# Altium PCB jetson_agx_breakout.PcbDoc
Units mil, origin at the board's own origin, x right, y up, seen from the top; angles counter-clockwise.
Board outline 2200 x 1550 mil, 2 copper layers (Top Layer, Bottom Layer); 27 components, 30 nets, 133 pads, 18 vias.
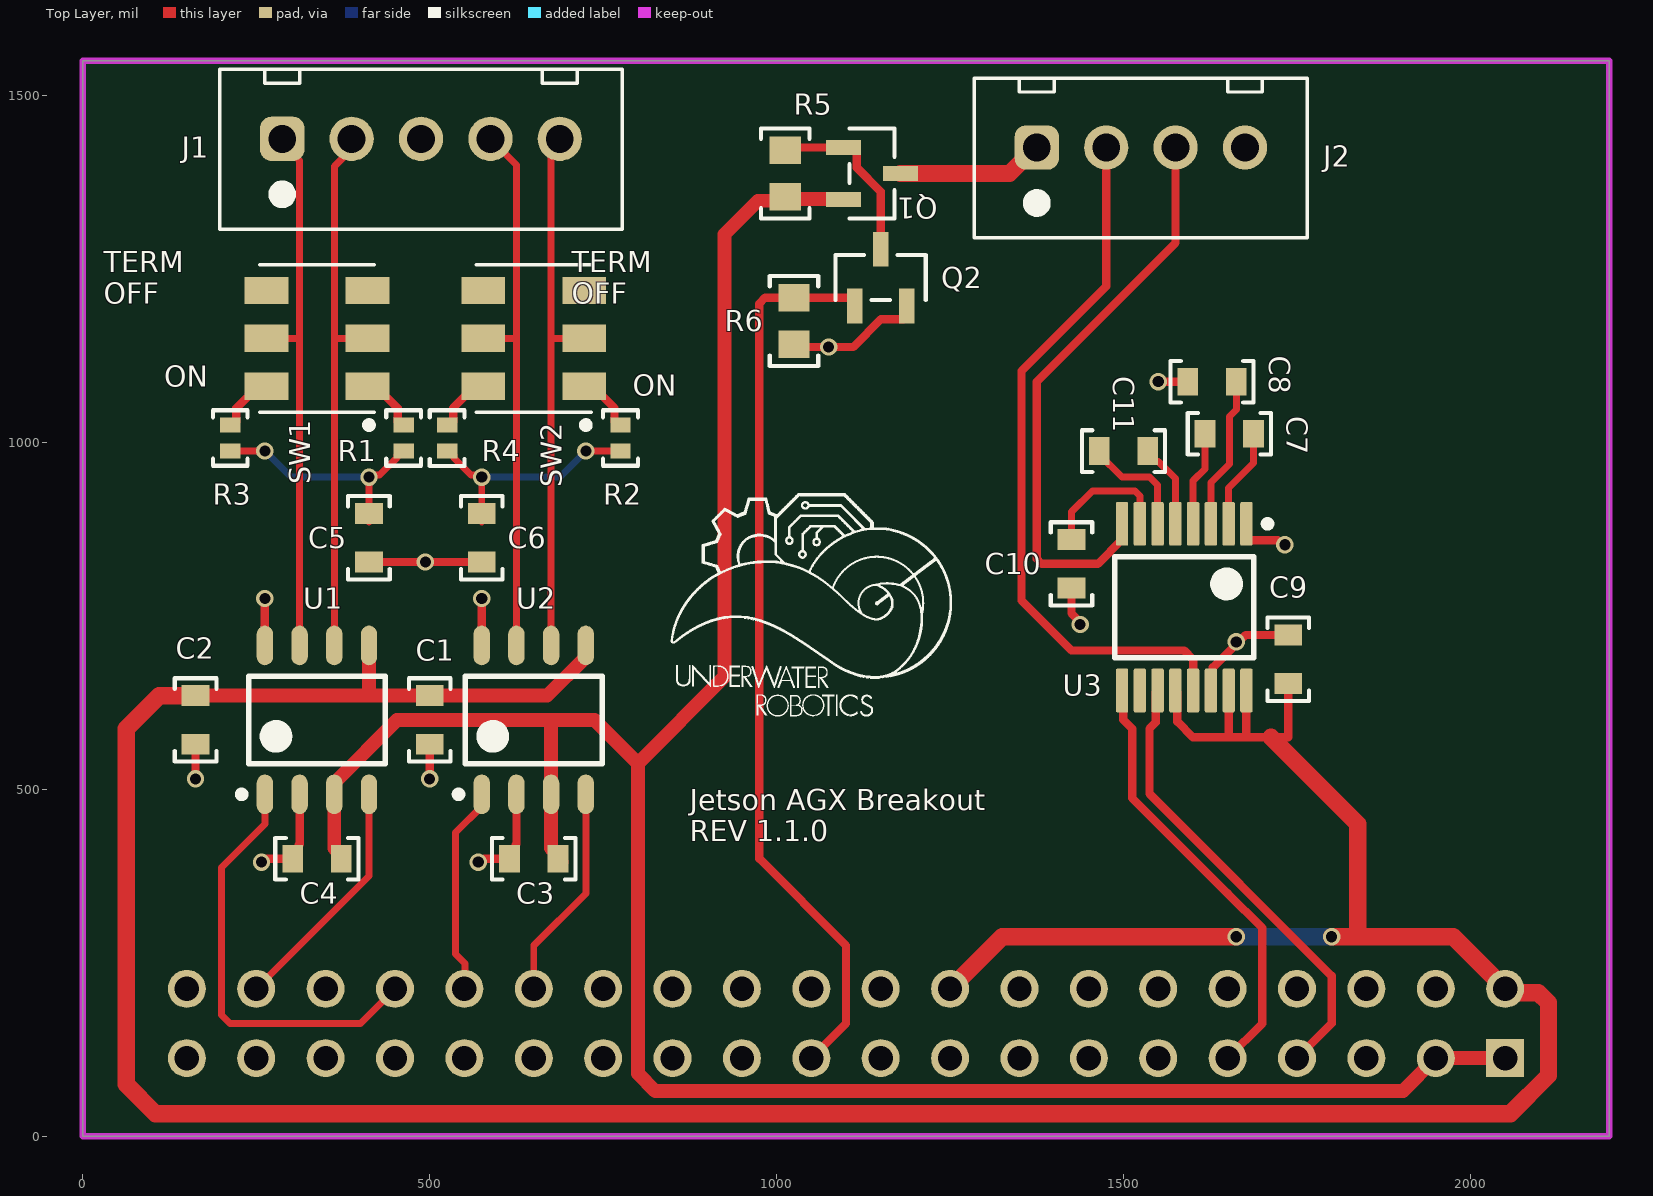
[diagram p0: Top Layer view]
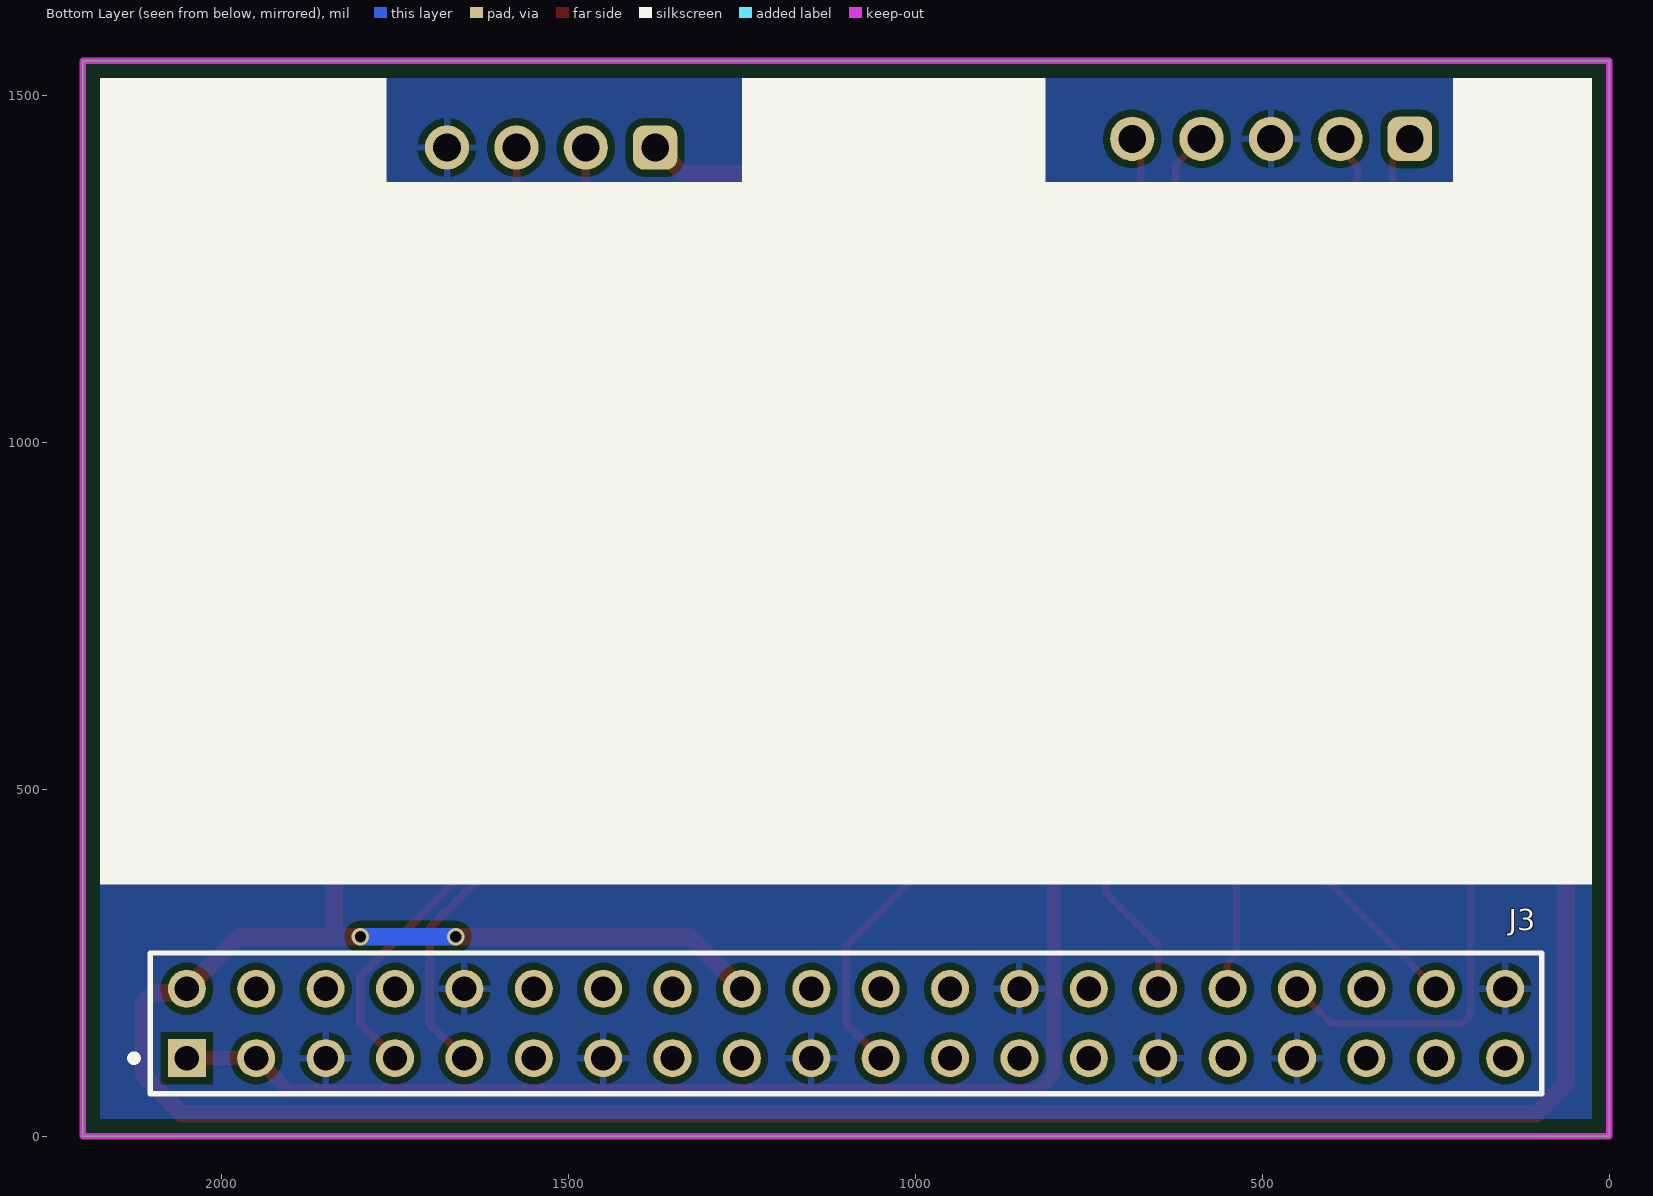
[diagram p1: Bottom Layer view, seen from below]
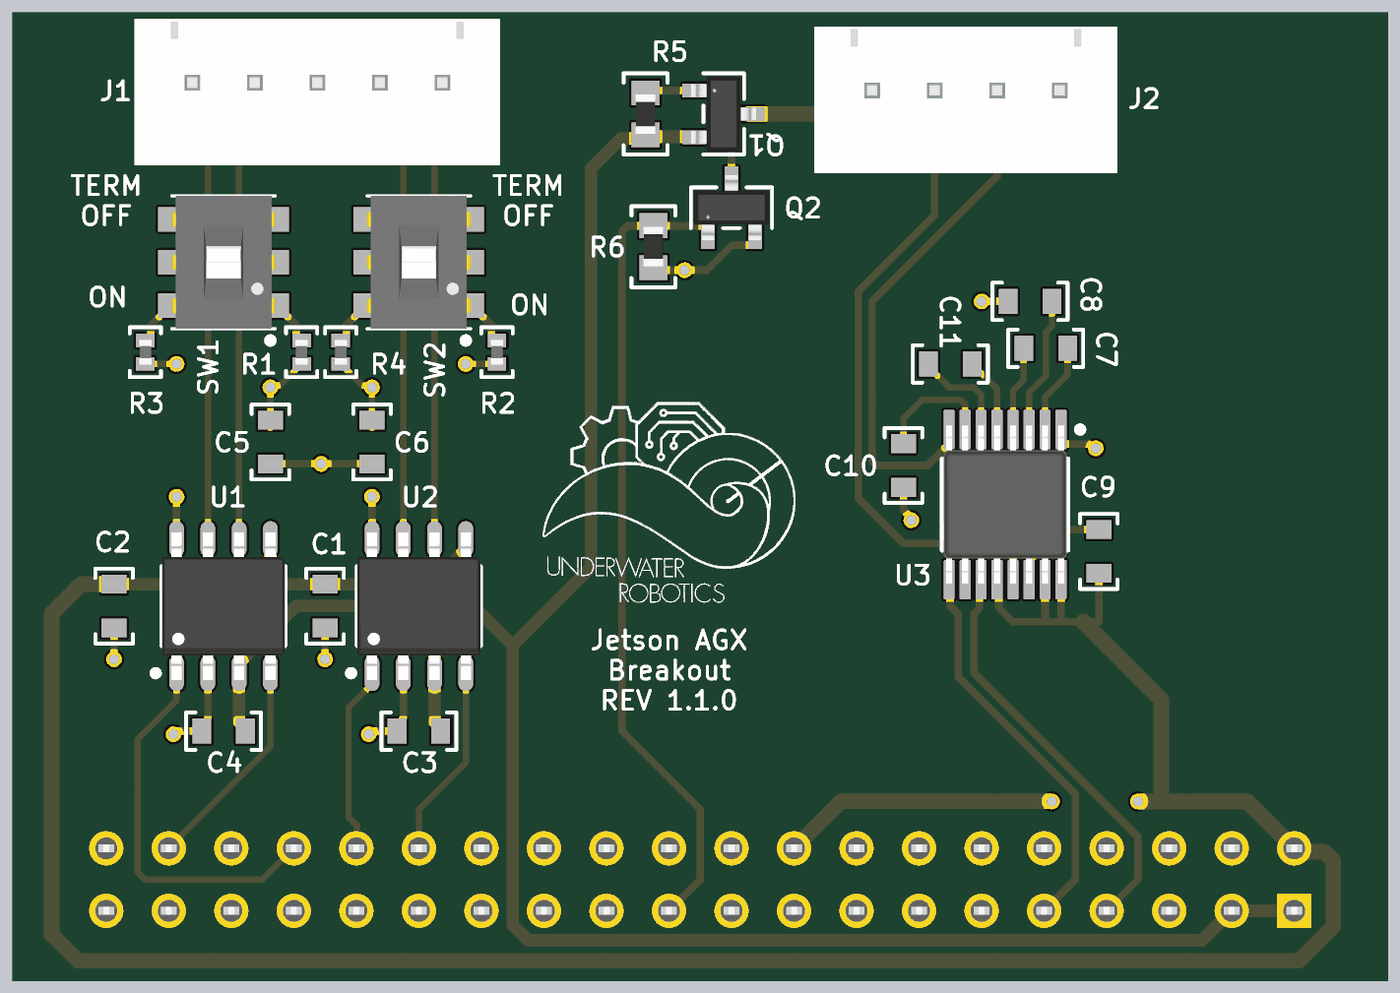
[diagram p2: 3D render of the assembled board from above, using the file's embedded part models]

## Layer stack, top to bottom
Top Solder: solder mask 0.4, Solder Resist, Dk 3.5
Top Layer: signal copper 1.4
Dielectric 1: dielectric 12.6, FR-4, Dk 4.8
Bottom Layer: signal copper 1.4
Bottom Solder: solder mask 0.4, Solder Resist, Dk 3.5

## Board outline
0,0 0,1550 2200,1550 2200,0

## Design rules (kind name [scope] priority, off if disabled: settings)
Clearance [All] p1: gap=10 ignorepadtopadclearanceinfootprint=FALSE except(0: Arc-Hole Track-Hole SMDPad-Hole THPad-Hole Via-Hole Fill-Hole Poly-Hole Region-Hole Text-Hole; 6: Arc-SMDPad Track-SMDPad SMDPad-SMDPad SMDPad-THPad SMDPad-Via SMDPad-Fill SMDPad-Poly SMDPad-Region)
MinimumSolderMaskSliver [All] p1: minsoldermaskwidth=7
PolygonConnect [All] p1: connectstyle=Relief reliefconductorwidth=10 reliefentries=4 polygonreliefangle="90 Angle" airgapwidth=10
RoutingVias [All] p1: holewidth=16 width=25 viastyle="Through Hole" minholewidth=16 minwidth=20 maxholewidth=28 maxwidth=50
SilkToSolderMaskClearance [IsPad] p1: minsilkscreentomaskgap=5 clearancetoexposedcopper=TRUE
SolderMaskExpansion [All] p1: expansion=4 istentingtop=FALSE
Width [All] p1: maxlimit=50 minlimit=10 preferedwidth=10
28 further rules are at their usual default settings.

## Components (designator, comment, footprint, x,y, rotation, side; value= is the part's Value field where it differs from the comment)
C1 "1uF Ceramic 16V" CAPACITOR_0603 500,600 r270 top value=1uF
C2 "1uF Ceramic 16V" CAPACITOR_0603 162.5,600 r270 top value=1uF
C3 "10uF Ceramic 6.3V" CAPACITOR_0603 650,400 r180 top
C4 "10uF Ceramic 6.3V" CAPACITOR_0603 337.5,400 r180 top
C5 "10nF Ceramic 6.3V" CAPACITOR_0603 412.5,862.5 r90 top value=0.01uF
C6 "10nF Ceramic 6.3V" CAPACITOR_0603 575,862.5 r90 top value=0.01uF
C7 "100nF Ceramic 6.3V" CAPACITOR_0603 1652.5,1012.5 r180 top value=0.1uF
C8 "100nF Ceramic 6.3V" CAPACITOR_0603 1627.5,1087.5 r180 top value=0.1uF
C9 "100nF Ceramic 6.3V" CAPACITOR_0603 1737.5,687.5 r90 top value=0.1uF
C10 "100nF Ceramic 6.3V" CAPACITOR_0603 1425,825 r270 top value=0.1uF
C11 "100nF Ceramic 6.3V" CAPACITOR_0603 1500,987.5 r180 top value=0.1uF
J1 "XH2.54 VERT" CONN_JST_XH254_5POS_VERT 287.5,1437.5 r0 top
J2 "XH2.54 VERT" CONN_JST_XH254_4POS_VERT 1375,1425 r0 top
J3 "7-534206-0" FP-7-534206-0-MFG 1100,162.5 r180 bottom
Q1 "MOSFET P-CHANNEL 20V 4.7A SOT23" SOT-23-3 1137.5,1387.5 r270 top
Q2 "MOSFET N-CH 30V 5.8A SOT-23-3" SOT-23-3 1150,1237.5 r0 top
R1 "60.4 Ohm 1% 1/16W" RESISTOR_0402 462.5,1006.3 r270 top
R2 "60.4 Ohm 1% 1/16W" RESISTOR_0402 775,1006.3 r270 top
R3 "60.4 Ohm 1% 1/16W" RESISTOR_0402 212.5,1006.3 r270 top
R4 "60.4 Ohm 1% 1/16W" RESISTOR_0402 525,1006.2 r270 top
R5 "10k Ohm 5% 1/10W" RESISTOR_0603 1012.5,1387.5 r90 top
R6 "10k Ohm 5% 1/10W" RESISTOR_0603 1025,1175 r270 top
SW1 "Switch DPDT" CAS-220TA 337.5,1150 r90 top
SW2 "Switch DPDT" CAS-220TA 650,1150 r90 top
U1 "CAN Transceiver" SOIC-8 337.5,600 r90 top
U2 "CAN Transceiver" SOIC-8 650,600 r90 top
U3 "SN65C3221EPWR" PW0016A_M 1587.5,762.5 r270 top

## Footprints (in the part's own frame and the unit in brackets; to place one, negate y for a bottom-side part, rotate by r counter-clockwise, add the part's x,y. Pads: shape width x height; smd on the part's side, far side on the other; paste and mask are expansions set on the pad)
CAPACITOR_0603 [mil] "CAPACITOR 0603"
  rect 30x40 smd: 1(-35,0) 2(35,0)
  silkscreen extent -60,-30 60,30, body extent -31,-16 32,16, height 31
CAS-220TA [mm] "SWITCH SLIDE DPDT 100MA 6V"
  rrect0% 1x1.6 smd: 1(-1.75,-1.85) 2(0,-1.85) 3(1.75,-1.85) 4(-1.75,1.85) 5(0,1.85) 6(1.75,1.85)
  silkscreen extent -3.3,-2.1 2.7,2.1, body extent -2.7,-2.1 2.7,2.1, height 2.51
CONN_JST_XH254_4POS_VERT [mm] "JST XH 2.54mm Pitch 4 Pos Vertical"
  rrect50% 1.62x1.62 hole 1.02: 1(0,0)
  round 1.62 hole 1.02: 2(2.54,0) 3(5.08,0) 4(7.62,0)
  silkscreen extent -2.29,-3.3 9.91,2.54, body extent -2.34,-3.35 9.96,2.49, height 7.21
CONN_JST_XH254_5POS_VERT [mm] "JST XH 2.54mm Pitch 5 Pos Vertical"
  rrect50% 1.62x1.62 hole 1.02: 1(0,0)
  round 1.62 hole 1.02: 2(2.54,0) 3(5.08,0) 4(7.62,0) 5(10.16,0)
  silkscreen extent -2.29,-3.3 12.45,2.54, body extent -2.34,-3.35 12.5,2.49, height 7.21
FP-7-534206-0-MFG [mm]
  rect 1.39x1.39 hole 0.89 paste-1000 mask+0: 1(-24.13,-1.27)
  round 1.39 hole 0.89 paste-1000 mask+0: 2(-24.13,1.27) 3(-21.59,-1.27) 4(-21.59,1.27) 5(-19.05,-1.27) 6(-19.05,1.27) 7(-16.51,-1.27) 8(-16.51,1.27) 9(-13.97,-1.27) 10(-13.97,1.27) 11(-11.43,-1.27) 12(-11.43,1.27) 13(-8.89,-1.27) 14(-8.89,1.27) 15(-6.35,-1.27) 16(-6.35,1.27) 17(-3.81,-1.27) 18(-3.81,1.27) 19(-1.27,-1.27) 20(-1.27,1.27) 21(1.27,-1.27) 22(1.27,1.27) 23(3.81,-1.27) 24(3.81,1.27) 25(6.35,-1.27) 26(6.35,1.27) 27(8.89,-1.27) 28(8.89,1.27) 29(11.43,-1.27) 30(11.43,1.27) 31(13.97,-1.27) 32(13.97,1.27) 33(16.51,-1.27) 34(16.51,1.27) 35(19.05,-1.27) 36(19.05,1.27) 37(21.59,-1.27) 38(21.59,1.27) 39(24.13,-1.27) 40(24.13,1.27)
  silkscreen extent -26.19,-2.58 25.47,2.58, body extent -25.4,-2.51 25.4,2.51, height 8.64
PW0016A_M [mm] "SOP, 16-Leads, Body 5.1x4.5mm, Pitch 0.65mm, IPC Low Density"
  rrect22% 1.6x0.45 smd: 1(-3.05,2.275) 2(-3.05,1.625) 3(-3.05,0.975) 4(-3.05,0.325) 5(-3.05,-0.325) 6(-3.05,-0.975) 7(-3.05,-1.625) 8(-3.05,-2.275) 9(3.05,-2.275) 10(3.05,-1.625) 11(3.05,-0.975) 12(3.05,-0.325) 13(3.05,0.325) 14(3.05,0.975) 15(3.05,1.625) 16(3.05,2.275)
  silkscreen extent -3.17,-2.55 1.85,3.17, body extent -3.21,-2.5 3.21,2.5, height 1
RESISTOR_0402 [mm] "Resistor 0402"
  rect 0.55x0.75 smd: 1(-0.475,0) 2(0.475,0)
  silkscreen extent -1.02,-0.64 1.02,0.64, body extent -0.5,-0.25 0.5,0.25, height 0.25
RESISTOR_0603 [mil] "Resistor 0603"
  rect 40x45 smd: 1(-33.5,0) 2(33.5,0)
  silkscreen extent -65,-35 65,35, body extent -31,-16 32,16, height 16
SOIC-8 [mm] "SOIC, 8-Leads, Body 4.90x3.90mm, Pitch 1.27mm, IPC Medium Density"
  oval 1.45x0.6 smd: 1(-2.725,1.905) 2(-2.725,0.635) 3(-2.725,-0.635) 4(-2.725,-1.905) 5(2.725,-1.905) 6(2.725,-0.635) 7(2.725,0.635) 8(2.725,1.905)
  silkscreen extent -2.85,-2.5 1.6,2.88, body extent -3,-2.5 3,2.5, height 1.75
SOT-23-3 [mil]
  rect 22x50 smd paste+0 mask+4: 1(-37.5,-41) 2(37.5,-41) 3(0,41)
  silkscreen extent -65,-33 65,33, body extent -60,-52 60,52, height 44

## Part data
C1 C2: library part CAPACITOR_1uF_0603, "Cap 1uF 16V +/-10% / Ceramic 0603", Supplier Part Number 1=399-7847-1-ND, Tolerance="+/- 10%", Voltage=16V, Made By="Flip B", Supplier 1=Digi-Key
C3 C4: library part CAPACITOR_10uF_0603, "Cap 10uF 6.3V +/-20% / Ceramic 0603", Supplier Part Number 1=1276-1119-1-ND, Tolerance="+/- 20%", Value (uF)="10 uF", Voltage=6.3V, ComponentLink1Description=Digikey, ComponentLink1URL=https://www.digikey.com/en/products/detail/samsung-electro-mechanics/CL10A106MQ8NNNC/3886777, Made By="Flip B", Supplier 1=Digi-Key
C5 C6: library part CAPACITOR_0.01uF_0603, "Cap 10nF 6.3V +/-20% / Ceramic 0603", Supplier Part Number 1=80-C0603C103K9R, Tolerance="+/- 10%", Voltage=6.3V, ComponentLink1Description=Datsheet, ComponentLink1URL=https://www.mouser.com/datasheet/2/212/KEM_C1002_X7R_SMD-1102033.pdf, Made By="Flip B", Supplier 1=Mouser
C7 C8 C9 C10 C11: library part CAPACITOR_0.1uF_0603, "Cap 100nF 6.3V +/-10% / Ceramic 0603", Supplier Part Number 1=399-15351-1-ND, Tolerance="+/- 10%", Voltage=6.3V, ComponentLink1Description=Datsheet, ComponentLink1URL=https://www.mouser.com/datasheet/2/212/KEM_C1002_X7R_SMD-1102033.pdf, Made By="Flip B", Supplier 1=Digi-Key
J1: library part CONN_JST_XH254_5POS_VERT, "JST XH 2.54mm Pitch 5 Pos Vertical", Color=White, Current Per Pin=4A, Manufacturer=JST, ComponentLink1Description="Purchase Link", ComponentLink1URL=https://www.amazon.com/460PCS-XH2-54-Connector-Terminal-Connectors/dp/B09DBGVX5C, Configuration=Vertical, Created by="Robert P", NOTE="Do not use JST 2.5mm parts with this footprint. JST does not make 2.54mm pitch pins, rather only clones make this connector!", Number of Positions=5, Pitch=2.54mm, Series="XH 2.54"
J2: library part CONN_JST_XH254_4POS_VERT, "JST XH 2.54mm Pitch 4 Pos Vertical", Color=White, Current Per Pin=4A, Manufacturer=JST, ComponentLink1Description="Purchase Link", ComponentLink1URL=https://www.amazon.com/460PCS-XH2-54-Connector-Terminal-Connectors/dp/B09DBGVX5C, Configuration=Vertical, Created by="Robert P", NOTE="Do not use JST 2.5mm parts with this footprint. JST does not make 2.54mm pitch pins, rather only clones make this connector!", Number of Positions=4, Pitch=2.54mm, Series="XH 2.54"
J3: library part CMP-03369-000068-1, "CONN RCPT 40POS 0.1 GOLD PCB", Current Rating=2A, Manufacturer="TE Connectivity", Temperature="-65°C to +105°C", Temperature Range High=+105°C, Temperature Range Low=-65°C, Voltage Rating=333V, Automotive=No, Category=Conn, ComponentLink2Description=Datasheet, ComponentLink2URL=https://octopart.com/datasheet/7-534206-0-te+connectivity-39516831, Conn Gender=Female, Conn Orientation=Vertical, Contact Material=Gold,Nickel, Device Class L1=Connectors, Device Class L2="Headers and Wire Housings", Device Class L3=unset, Digikey Description="CONN RCPT 40POS 0.1 GOLD PCB", Footprint Url=https://www.mouser.in/datasheet/2/418/NG_CD_534206_R7-1252933.pdf, Height=8.9mm, Is Female=yes, Lead Free=Yes, Manufacturer Part Number=7-534206-0, Mouser Description="Headers & Wire Housings REC 2X20P VRT T/H", Number of Contacts=40, Number of Rows=2, Octopart=https://octopart.com/7-534206-0-te+connectivity-39516831, Package=7-534206-0, Pitch=2.54mm, RoHS=TRUE, Standoff Height=0.38mm
Q1: library part TSM500P02CX, "P-Channel 20 V 4.7A (Tc) 1.56W (Tc) Surface Mount SOT-23", Amp Rating="4.7 A", Package="TO-236-3, SC-59, SOT-23-3", Power Dissipation="1.56W (Tc)", Supplier Part Number 1=TSM500P02CXRFGCT-ND, Created by="Robert Pafford", FET Type=P-Channel, Manufacturer_Part_Number=TSM500P02CX, Rds (on)="50mOhm @ 3A, 4.5V", Supplier 1=Digi-Key, Vdss="20 V", Vendor="Taiwan Semiconductor Corporation", Vgs (Max)=±10V, Vgs (th)="800mV @ 250µA"
Q2: library part AO3404A, "N-Channel 30 V 5.8A (Ta) 1.4W (Ta) Surface Mount SOT-23-3", Amp Rating="5.8 A", Package=SOT23-3L, Power Dissipation="1.4W (Ta)", Supplier Part Number 1=785-1004-1-ND, Created by="Dylan T", FET Type=N-Channel, Manufacturer _Part_Number=AO3404A, Rds (on)="28mOhm @ 5.8A, 10V", SourceLibrary=ON_Semiconductor_2020-01-13, Supplier 1=Digi-Key, Vdss=30V, Vendor="Alpha & Omega Semiconductor Inc.", Vgs (Max)="3V @ 5.8A, 10V", Vgs (th)="3V @ 250µA"
R1 R2 R3 R4: library part RESISTOR_60.4_0402, "RES 60.4 OHM 1% 1/16W 0402", Digikey Part Numer=CR0603-JW-104ELFTR-ND, Supplier Part Number 1=13-AC0402FR-0760R4LCT-ND, Tolerance="+/- 1%", Value  (Ohms)=60.4, Made By="Robert Pafford", Supplier=Digikey, Supplier 1=Digi-Key, Wattage=1/16W
R5 R6: library part RESISTOR_10K_0603, "RES 10k OHM 5% 1/10W 0603", Digikey Part Numer=CR0603-JW-104ELFTR-ND, Supplier Part Number 1=2019-RK73B1JTTD103JCT-ND, Tolerance="+/- 5%", Value  (Ohms)=10K, ComponentLink1Description=Datasheet, ComponentLink1URL=https://www.bourns.com/docs/product-datasheets/CRxxxxx.pdf, Made By="Robert Pafford", Supplier=Digikey, Supplier 1=Digi-Key, Wattage=1/8W
SW1 SW2: library part CAS-220TA_CAN_TERM, "GOLD SWITCH FLUSH SLIDE DPDT 100MA 6V", Current Rating="100 mA", Supplier Part Number 1=CAS220JCT-ND, Voltage Rating=6VDC, Contact Finish=Gold, Made By="Robert Pafford", Supplier 1=Digi-Key, Switch Function=DPDT
U1 U2: library part TJA1442AT, "CAN Interface IC High-Speed CAN Transceiver with Standby Mode", Supplier Part Number 1=771-TJA1442AT/0Z, Made By="Robert Pafford", Max Data Rate=5Mbps, Supplier 1=Mouser
U3: library part CMP-0299-01595-2, "3-V to 5.5-V Single-Channel RS-232 1-Mbit/s Line Driver / Receiver with ±15-kV IEC ESD Protection, -40 to 85 degC, 16-Pin SSOP (DB), Green (RoHS & no Sb/Br)", Drivers Per Package=1, Supply Voltage(s)(V)="3.3 or 5.0", ComponentLink1Description="Manufacturer URL", ComponentLink1URL=www.ti.com, ComponentLink2Description=Datasheet, ComponentLink2URL=http://www.ti.com/general/docs/lit/getliterature.tsp?genericPartNumber=SN65C3221E&fileType=pdf, ComponentLink3Description="Package Specification", ComponentLink3URL=http://www.ti.com/litv/pdf/mpds361, DatasheetVersion=SLLS694B, ESD HBM(kV)=+/-15, ICC(Max)(mA)=1, IEC-61000-4-2 SUPPORT=TRUE, PackageDescription="16-Pin Plastic Thin Small Outline Package 5 x 4.4 mm Body ,0.65 mm Pitch", PackageReference=PW0016A, PackageVersion="revG, Feb-2011", Receivers Per Package=1, RS-232=TRUE, Single Supply=TRUE, SubFamily=RS-232

## Via types
v1: diameter 25, hole 16, Top Layer to Bottom Layer, 18 vias

## Nets (pads, with @x,y where several pads share a name; then routed paths per layer and width w, separated by ;. In a path a pad name is that pad's centre, name@x,y a point inside that pad or via, vN(x,y) a via of type N, cw(c..) or ccw(c..) an arc to the next point about the centre after c; other vN are vias at no path point)
3v3: C1.1 C2.1 C9.1 J3.2 J3.18 U1.5 U2.5 U3.12 U3.15 U3.16 | length 5212.5
  Top Layer w12: U3.12 1577.56,639.56 1577.56,597.44 1600,575 1650,575 ; U3.15 1651.48,576.48 1650,575 ; U3.16 1677.07,577.07 1675,575 ; C9.1 1737.5,575 1712.5,575 1675,575 ; 1650,575 1675,575
  Top Layer w20: C2.1 412.5,635 ; U1.5@412.5,716.5 U1.5 412.5,635 ; U2.5 725,690.55 669.45,635 C1.1 412.5,635
  Top Layer w25: C2.1 110,635 62.5,587.5 62.5,75 104.86,32.64 2057.64,32.64 2112.5,87.5 2112.5,192.17 2097.86,206.81 2055.69,206.81 J3.2 1975,287.5 1837.5,287.5 ; J3.18 1325.08,287.58 1662.42,287.58 v1(1662.5,287.5) ; 1712.5,575 1837.5,450 1837.5,287.5 ; v1(1800,287.5) 1837.5,287.5
  Bottom Layer w25: v1(1662.5,287.5) v1(1800,287.5)
+5: C3.1 C4.1 J3.1 J3.3 Q1.2 R5.1 U1.3 U2.3 | length 3562.8
  Top Layer w20: C4.1@372.5,395 C4.1 ; C4.1@372.5,405 362.5,415 U1.3 362.5,509.45 453.05,600 675,600 ; C3.1@689.96,395.04 C3.1 685,405 675,415 U2.3 675,600 ; Q1.2 1095.5,1351 1015.5,1351 R5.1 1006.79,1348.29 973.29,1348.29 925,1300 925,662.5 800,537.5 ; J3.1 J3.3 1902.64,65.14 825,65.14 800,90.14 800,537.5 ; 675,600 737.5,600 800,537.5
can0_din: J3.30 U2.4 | length 311.3
  Top Layer w10: J3.30 650,275 725,350 U2.4
can0_dout: J3.32 U2.1 | length 316
  Top Layer w10: J3.32@539.91,202.41 551,213.5 551,249 537.5,262.5 537.5,437.5 575,475 U2.1
can1_din: J3.38 U1.4 | length 359.9
  Top Layer w10: J3.38@241.26,203.76 412.5,375 U1.4
can1_dout: J3.34 U1.1 | length 619.5
  Top Layer w10: U1.1 262.5,450 200,387.5 200,175 212.5,162.5 400,162.5 J3.34
GND: C1.2 C2.2 C3.2 C4.2 C5.1 C6.1 C8.2 C9.2 C10.2 J1.3 J2.4 J3.5 J3.10 J3.13 J3.19 J3.26 J3.29 J3.33 J3.40 Q2.2 R6.2 U1.2 U1.8 U2.2 U2.8 U3.1 U3.14 | length 1226.3
  Top Layer w12: v1(162.5,515) C2.2 ; v1(257.5,395) 261.02,395 266.02,400 C4.2 311.5,409 311.5,420.03 312.5,421.03 U1.2 ; U1.8 v1(262.5,775) ; C5.1 C6.1 ; v1(500,515) C1.2 ; v1(570,395) 573.52,395 578.52,400 C3.2 624,409 624,420.03 625,421.03 U2.2 ; U2.8 v1(575,775) ; R6.2 1029,1137.5 v1(1075,1137.5) 1110.51,1137.5 1150.51,1177.5 1182.5,1177.5 1187.5,1182.5 Q2.2 ; C10.2 1425,753.52 1437.5,741.02 v1(1437.5,737.5) ; v1(1550,1087.5) C8.2 ; U3.14 1628.74,645.28 1628.74,675.87 v1@1663.94,711.06 ; v1(1662.5,712.5) 1666.02,712.5 1676.02,722.5 C9.2 ; U3.1 1677.07,861.89 1679.93,859.03 1722.45,859.03 1728.98,852.5 v1(1732.5,852.5)
  other v1: 493.75,827.5
imu_pwr_ctrl: J3.21 Q2.1 R6.1 | length 1310.1
  Top Layer w12: J3.21 1100,162.5 1100,275 975,400 975,1200 983.5,1208.5 R6.1 1107.5,1208.5 1112.5,1203.5 Q2.1
NetC5_2: C5.2 R1.2 R3.2 | length 348.5
  Top Layer w10: R3.2 212.55,987.55 v1(262.5,987.5) v1(262.5,987.5) ; C5.2@412.5,885 v1(412.5,950) 415.37,952.87 427.77,952.87 452.74,977.83 452.74,981.77 458.56,987.6 R1.2
  Bottom Layer w10: v1(262.5,987.5) 300,950 v1(412.5,950)
NetC6_2: C6.2 R2.2 R4.2 | length 348.4
  Top Layer w10: R4.2 528.94,987.5 534.76,981.67 534.76,977.74 559.63,952.87 572.13,952.87 v1(575,950) C6.2@575,885 ; v1(725,987.5) v1(725,987.5) 774.95,987.55 R2.2
  Bottom Layer w10: v1(575,950) 687.5,950 v1(725,987.5)
NetC7_1: C7.1 U3.2 | length 144.8
  Top Layer w10: U3.2 1651.48,934.41 1687.5,970.43 C7.1
NetC7_2: C7.2 U3.4 | length 137
  Top Layer w10: U3.4 1600.3,944.68 1617.5,961.89 C7.2
NetC8_1: C8.1 U3.3 | length 220.1
  Top Layer w10: U3.3 1625.89,941.99 1652.5,968.61 1652.5,1037.5 1662.5,1047.5 C8.1
NetC10_1: C10.1 U3.7 | length 194.3
  Top Layer w10: C10.1 1425,900 1455,930 1516.54,930 1523.52,923.02 U3.7
NetC11_1: C11.1 U3.5 | length 124.3
  Top Layer w10: C11.1 1535,982.5 1545,972.5 1550,972.5 1574.7,947.8 U3.5
NetC11_2: C11.2 U3.6 | length 163.2
  Top Layer w10: C11.2 1465,982.5 1497.5,950 1537.5,950 1549.11,938.39 U3.6
NetJ1_1: J1.1 SW1.5 U1.7 | length 788.4
  Top Layer w10: SW1.5 312.5,1150 ; J1.1 287.5,1431.58 312.5,1406.58 312.5,1150 ; U1.7 312.5,1150
NetJ1_2: J1.2 SW1.2 U1.6 | length 788.4
  Top Layer w10: U1.6 362.5,1150 ; J1.2 387.5,1422.95 362.5,1397.95 362.5,1150 ; SW1.2 362.5,1150
NetJ1_4: J1.4 SW2.5 U2.7 | length 793.6
  Top Layer w10: SW2.5 625,1150 ; J1.4 625,1400 625,1150 ; U2.7 625,1150
NetJ1_5: J1.5 SW2.2 U2.6 | length 783.2
  Top Layer w10: U2.6 675,1150 ; J1.5 687.5,1422.95 675,1410.45 675,1150 ; SW2.2 675,1150
NetJ2_1: J2.1 Q1.3 | length 229.7
  Top Layer w20: J2.1@1362.5,1437.5 J2.1
  Top Layer w25: Q1.3 1335.64,1387.5 1373.14,1425 J2.1
NetJ2_2: J2.2 U3.13 | length 1037.8
  Top Layer w12: J2.2@1475,1432.03 1475,1225 1353,1103 1353,772 1425,700 1587.5,700 1600.3,687.2 U3.13
NetJ2_3: J2.3 U3.8 | length 838.8
  Top Layer w12: U3.8 1497.93,859.94 1462.99,825 1382.03,825 1375,832.03 1375,1087.5 1575,1287.5 J2.3
NetQ1_1: Q1.1 Q2.3 R5.2 | length 262.5
  Top Layer w12: R5.2 1016.5,1425 Q1.1 1110.5,1425 1115.5,1420 1115.5,1396 1150,1361.5 Q2.3
NetR1_1: R1.1 SW1.1 | length 86.9
  Top Layer w12: SW1.1 422.15,1081.1 453.74,1049.51 453.74,1029.83 458.56,1025 R1.1
NetR2_1: R2.1 SW2.1 | length 86.9
  Top Layer w12: SW2.1 734.65,1081.1 766.24,1049.51 766.24,1029.83 771.06,1025 R2.1
NetR3_1: R3.1 SW1.4 | length 86.9
  Top Layer w12: R3.1 216.44,1025 221.26,1029.83 221.26,1049.51 252.85,1081.1 SW1.4
NetR4_1: R4.1 SW2.4 | length 87
  Top Layer w12: R4.1 528.94,1024.9 533.76,1029.73 533.76,1049.51 565.35,1081.1 SW2.4
uart_rx: J3.9 U3.9 | length 634.3
  Top Layer w12: U3.9 1499.49,640.86 1499.49,603.31 1499.81,602.99 1499.81,600.19 1512.5,587.5 1512.5,487.5 1650,350 1700,300 1700,162.5 J3.9
uart_tx: J3.7 U3.11 | length 664.2
  Top Layer w12: U3.11 1546.26,639.56 1546.26,596.26 1537.5,587.5 1537.5,493.61 1800,231.11 1800,162.5 J3.7
pads on no net: J3.4 J3.6 J3.8 J3.11 J3.12 J3.14 J3.15 J3.16 J3.17 J3.20 J3.22 J3.23 J3.24 J3.25 J3.27 J3.28 J3.31 J3.35 J3.36 J3.37 J3.39 SW1.3 SW1.6 SW2.3 SW2.6 U3.10

## Polygon pours and split planes (outlines as drawn)
GND on Bottom Layer "GND_L02_P000" (solid, pour order 0): 25,1525 25,25 2175,25 2175,1525

## Keep-outs
Keep-Out Layer:
  the board outline again, w10

## Silkscreen, mask and mechanical layers (free items; w line width, h text height)
Top Overlay:
  drawing of 19 lines, arcs and shapes, not listed
  text "TERM / OFF" at 30.04,1200 h30
  text "TERM / OFF" at 705.04,1200 h30
  text "ON" at 117.5,1080 h30
  text "ON" at 792.5,1067.5 h30
  text "Jetson AGX Breakout / REV 1.1.0" at 875.06,425 h30
Bottom Overlay:
  rectangle: 812.5,1375 1250,1525
  rectangle: 25,1375 225,1525
  rectangle: 1762.5,1375 2175,1525
  rectangle: 25,362.5 2175,1375